# Altium PCB Nissan-RB25DET-ECU.PcbDoc (part 2 of 2)
Units mm, origin at the board's own origin, x right, y up, seen from the top; angles counter-clockwise.
Board outline 159 x 152 mm, 2 copper layers (Top Layer, Bottom Layer); 165 components, 7 nets, 721 pads, 78 vias.
Unrouted connection lines stored in the file: 23.
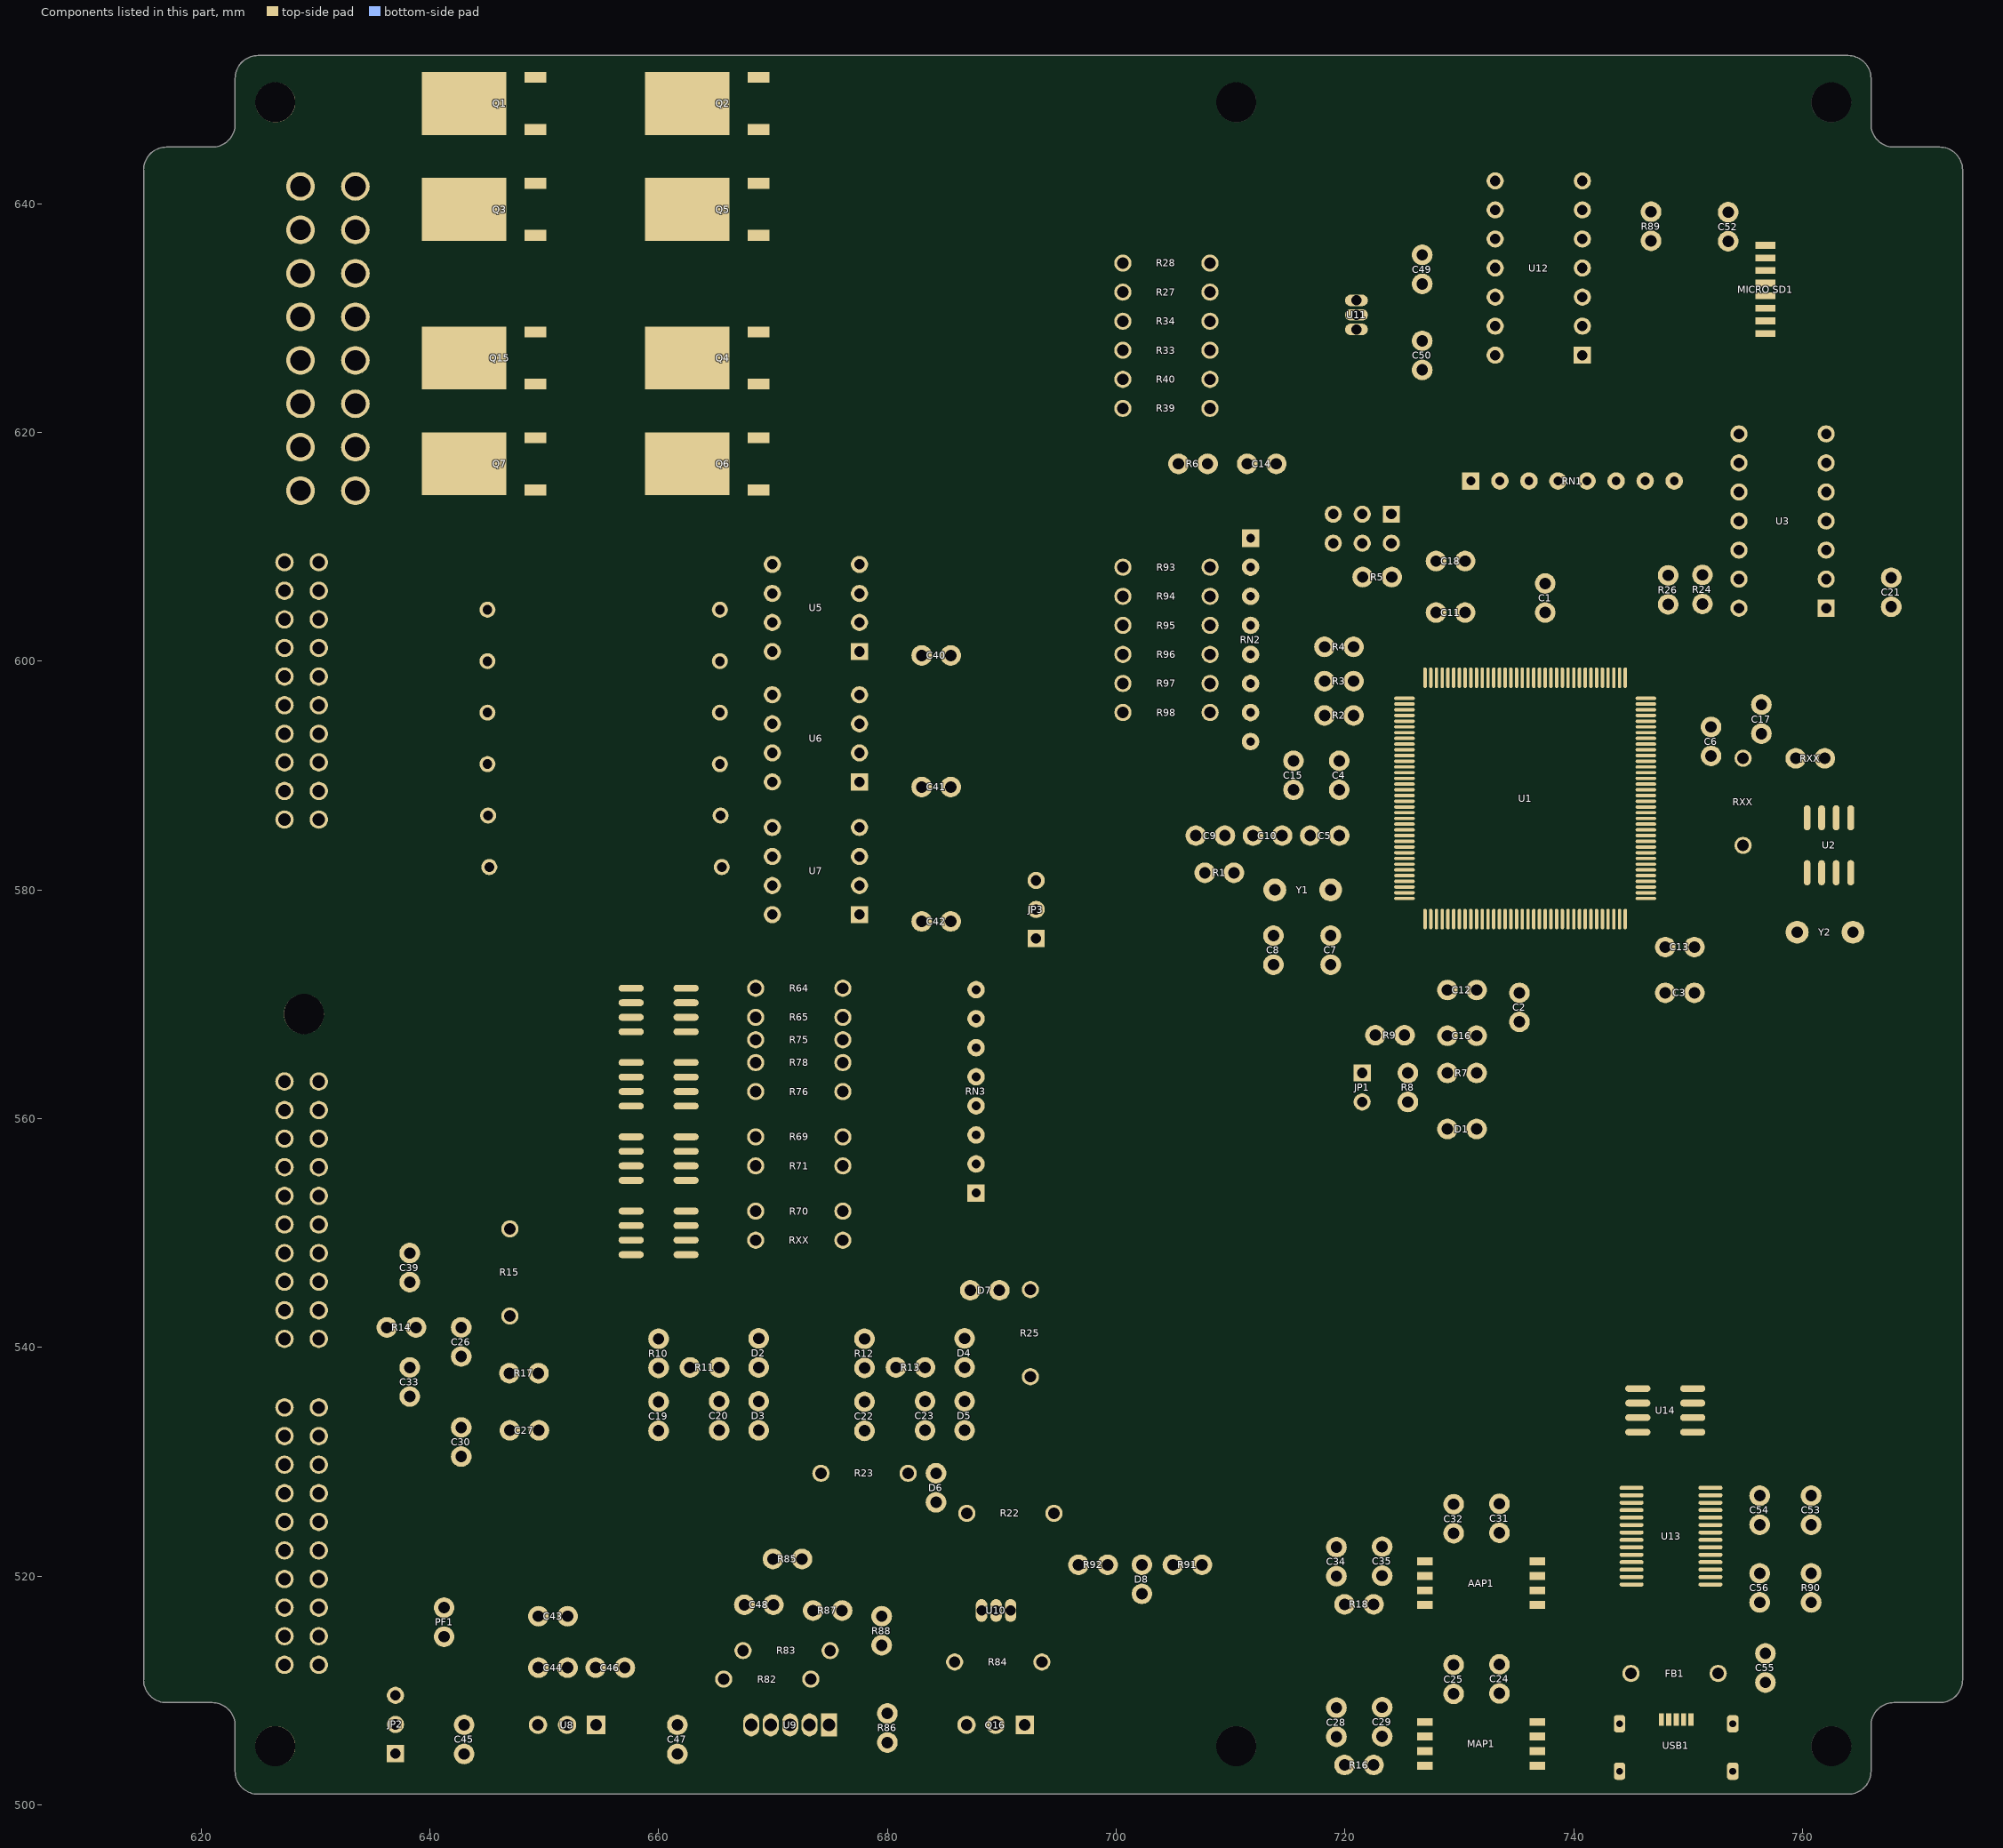
[diagram p2: the components of this part, seen from the top]

## Via types
v1: diameter 0.55, hole 0.254, Top Layer to Bottom Layer, 35 vias
v2: diameter 2, hole 1, Top Layer to Bottom Layer, 25 vias
v3: diameter 1, hole 0.6, Top Layer to Bottom Layer, 8 vias
v4: diameter 1.6, hole 0.8, Top Layer to Bottom Layer, 7 vias
v5: diameter 1.2, hole 0.5, Top Layer to Bottom Layer, 2 vias
v6: diameter 1.6/1.6 (per signal layer), hole 0.8, Top Layer to Bottom Layer, 1 vias

## Nets (pads, with @x,y where several pads share a name; then routed paths per layer and width w, separated by ;. In a path a pad name is that pad's centre, name@x,y a point inside that pad or via, vN(x,y) a via of type N, cw(c..) or ccw(c..) an arc to the next point about the centre after c; other vN are vias at no path point) (continued)
copper on no net: | length 7148.1
  Top Layer w0.254: 627.3,522.25 626,522.25 625,523.25 625,535.75 626.5,537.25 633.75,537.25 638,533 642.75,533 645.75,530 650.25,530 651.75,531.5 v1(651.75,540) ; 627.3,532.25 630.3,532.25 635.5,532.25 640.634,527.116 653.116,527.116 655.75,529.75 670.5,529.75 673.25,532.5 673.25,536.5 674.96,538.21 678,538.21 678,535.25 ; 627.3,534.75 630.3,534.75 634.25,534.75 641,528 652.75,528 655,530.25 655,536.5 656.71,538.21 660,538.21 660,535.25 ; 630.25,548.25 630.3,548.25 638.25,548.25 ; 630.3,522.25 630.25,522.25 632,524 663.061,524 665.311,526.25 675.439,526.25 679.189,522.5 695.21,522.5 696.71,521 ; 630.3,524.75 662.75,524.75 665,527 675.75,527 679.5,523.25 686.75,523.25 691.5,528 691.5,536.44 692.5,537.44 ; 630.3,529.75 636.75,529.75 640.25,526.25 662.129,526.25 664.879,529 674.19,529 ; 630.3,543.25 631,543.25 636,538.25 638.25,538.25 639.5,537 643.25,537 647,540.75 v1(653,540.75) ; 630.3,545.75 633.25,545.75 635,544 640.5,544 642.75,541.75 638.79,541.75 ; 649.25,614.97 650.97,614.97 652.25,616.25 657.75,621.75 673,621.75 688.75,606 688.75,573.543 714.393,547.9 748.707,547.9 767.7,566.893 767.7,589.207 758.657,598.25 752.25,598.25 749.75,595.75 746.3,595.75 ; 649.25,624.22 650.72,624.22 652,625.5 659.25,632.75 671.25,632.75 689.25,614.75 689.25,573.75 714.6,548.4 748.5,548.4 767.2,567.1 767.2,589 758.45,597.75 752.457,597.75 749.957,595.25 746.3,595.25 ; 649.25,637.22 v2(652,637.22) ; 649.25,646.47 v2(652,646.47) ; 651.5,518.5 653.5,518.5 661,511 665.69,511 ; 660,538.25 662.75,538.25 ; 662.4,549.38 668.49,549.38 ; 662.4,551.92 668.49,551.92 ; 662.4,555.875 668.49,555.875 ; 662.4,558.415 668.49,558.415 ; 662.4,562.37 668.49,562.37 ; 662.4,564.91 668.49,564.91 ; 662.4,568.865 668.49,568.865 ; 662.4,571.405 668.49,571.405 ; 665.29,535.29 665.29,538.25 668.75,538.25 ; 667.5,517.5 667.5,519 670,521.5 ; 668.46,540.5 668.75,540.79 ; 668.75,535.29 668.75,538.25 ; 668.75,614.97 v2(671.5,614.97) ; 668.75,624.22 v2(671.5,624.22) ; 668.75,637.22 v2(671.5,637.22) ; 668.75,646.47 v2(671.5,646.47) ; 672.54,521.5 673.5,520.54 673.5,517 ; 673.2,507 673.2,511 ; 674.9,513.5 674.9,507 679,507 680,508 ; 676.04,517 678.5,517 679.5,516 ; 676.11,551.915 680.665,551.915 684.79,556.04 687.75,556.04 702.01,556.04 713.15,544.9 749.95,544.9 770.7,565.65 770.7,590.45 759.9,601.25 752.414,601.25 750.414,603.25 744.379,603.25 743,601.871 743,598.55 ; 676.11,555.87 682.37,555.87 685.08,558.58 687.75,558.58 700.177,558.58 713.357,545.4 749.743,545.4 770.2,565.857 770.2,590.243 759.693,600.75 752.207,600.75 750.207,602.75 744.586,602.75 743.5,601.664 743.5,598.55 ; 676.11,558.41 681.91,558.41 684.62,561.12 687.75,561.12 698.344,561.12 713.564,545.9 749.536,545.9 769.7,566.064 769.7,590.036 759.486,600.25 752,600.25 750,602.25 744.793,602.25 744,601.457 744,598.55 ; 676.11,562.365 682.865,562.365 684.16,563.66 687.75,563.66 ; 676.11,564.905 683.155,564.905 684.45,566.2 687.75,566.2 693.972,566.2 713.772,546.4 749.328,546.4 769.2,566.272 769.2,589.828 759.278,599.75 751.793,599.75 749.793,601.75 745,601.75 744.5,601.25 744.5,598.55 ; 676.11,568.86 687.75,568.86 ; 676.11,571.4 687.75,571.4 ; 677.56,580.38 v2(681.25,580.38) ; 677.56,585.46 v2(681.25,585.46) ; 677.56,591.98 v2(681.25,591.98) ; 677.56,597.06 v2(681.25,597.06) ; 677.56,603.38 v2(681.25,603.38) ; 677.56,608.46 v2(681.25,608.46) ; 678,538.25 680.75,538.25 ; 681.81,529 684.25,529 685.75,529 686.94,527.81 686.94,525.5 ; 683.29,535.29 683.29,538.25 686.75,538.25 ; 686.46,540.5 686.75,540.79 ; 686.75,535.29 686.75,538.25 ; 687.75,568.74 692.139,568.74 713.979,546.9 749.121,546.9 768.7,566.479 768.7,589.621 759.071,599.25 751.836,599.25 749.336,596.75 746.3,596.75 ; 687.75,571.28 690.306,571.28 714.186,547.4 748.914,547.4 768.2,566.686 768.2,589.414 758.864,598.75 752.043,598.75 749.543,596.25 746.3,596.25 ; 689.85,545.06 692.5,545.06 694.31,543.25 750.5,543.25 771.669,564.419 771.669,590.831 758.5,604 755.33,607.17 754.44,607.17 ; 690.77,517 690.77,515.23 693.5,512.5 692,511 692,507 ; 694.56,525.5 695.5,526.44 v1(695.5,541) ; v2@694.75,622.1 700.58,622.1 ; v2@694.75,624.64 700.58,624.64 ; v2@694.75,627.18 700.58,627.18 ; v2@694.75,629.72 700.58,629.72 ; v2@694.75,632.26 700.58,632.26 ; v2@694.75,634.8 700.58,634.8 ; v2@694.76,595.51 700.59,595.51 ; v2@694.76,598.05 700.59,598.05 ; v2@694.76,600.59 700.59,600.59 ; v2@694.76,603.13 700.59,603.13 ; v2@694.76,605.67 700.59,605.67 ; v2@694.76,608.21 700.59,608.21 ; v1(695.5,544.5) 695.5,547.957 v1(698.793,551.25) ; v1(696,540) 696,526.5 699,523.5 706.75,523.5 707.5,522.75 707.5,521 ; v1(696,545.25) 696,547.75 v1(698.5,550.25) ; 699.25,521 702.25,521 704.96,521 ; 706.96,584.75 706.96,582.29 707.75,581.5 ; 707.99,617.25 711.45,617.25 ; 708.2,622.1 718.7,622.1 720.7,620.1 731.6,620.1 733.54,618.16 733.54,615.75 733.54,602.71 735,601.25 735,598.55 ; 708.2,624.64 717.06,624.64 721,620.7 733.5,620.7 736.08,618.12 736.08,615.75 736.08,610.33 734,608.25 734,603 735.5,601.5 735.5,598.55 ; 708.2,627.18 715.42,627.18 721.3,621.3 735.4,621.3 738.62,618.08 738.62,615.75 738.62,612.12 734.5,608 734.5,603.25 736,601.75 736,598.55 ; 708.2,629.72 713.78,629.72 721.6,621.9 737.3,621.9 741.16,618.04 741.16,615.75 741.16,613.91 735,607.75 735,603.5 736.5,602 736.5,598.55 ; 708.2,632.26 712.14,632.26 721.9,622.5 739.3,622.5 743.7,618.1 743.7,615.75 743.7,607.7 738,602 738,598.55 ; 708.2,634.8 710.6,634.8 722.3,623.1 741.2,623.1 746.24,618.06 746.24,615.75 746.24,609.49 738.5,601.75 738.5,598.55 ; 708.21,595.51 711.75,595.51 714.01,595.51 716.25,597.75 716.25,602 717.439,603.189 723.061,603.189 723.75,602.5 723.75,597.25 724.25,596.75 725.2,596.75 ; 708.21,598.05 711.75,598.05 714.55,598.05 715.75,599.25 715.75,602.25 717.22,603.72 723.28,603.72 727,600 727,598.55 ; 708.21,600.59 711.75,600.59 714.34,600.59 715.25,601.5 715.25,602.5 717,604.25 723.5,604.25 727.5,600.25 727.5,598.55 ; 708.21,603.13 711.75,603.13 715.13,603.13 716.75,604.75 723.707,604.75 728,600.457 728,598.55 ; 708.21,605.67 711.75,605.67 716.33,605.67 716.75,605.25 723.914,605.25 728.5,600.664 728.5,598.55 ; 708.21,608.21 711.75,608.21 714.54,608.21 717,605.75 724.121,605.75 729,600.871 729,598.55 ; 709.25,617.25 711,615.5 ; 709.5,585 711,586.5 716.25,586.5 ; 710.27,581.52 711.96,583.21 711.96,584.75 ; 711.855,584.645 713.5,583 720.25,583 720.9,583.65 720.9,586.15 722,587.25 725.2,587.25 ; 713.81,580.06 715.75,582 720,582 721.4,583.4 721.4,584.15 723.5,586.25 725.2,586.25 ; 713.87,576.12 713.87,580 ; 714.5,584.75 716.25,586.5 ; v1(715.396,567.854) 717.293,569.75 721.043,569.75 727,575.707 727,577.45 ; v1(716.503,568.247) 717.506,569.25 721.25,569.25 727.5,575.5 727.5,577.45 ; v1(718.5,553.75) 718.5,565.043 728.707,575.25 729.5,576.043 729.5,577.45 ; 718.75,576 718.75,580 721.9,583.15 721.9,583.9 723.75,585.75 725.2,585.75 ; 719.25,505.96 719.25,504.21 719.96,503.5 ; 719.25,508.5 723.29,508.5 ; 719.25,520 719.25,518.25 719.96,517.54 ; 719.25,522.54 723.29,522.54 ; 719.5,584.75 719.5,585.75 721.5,587.75 725.2,587.75 ; 720.25,586.5 716.25,586.5 ; 720.75,598.25 723.25,595.75 723.25,591.25 723.75,590.75 725.2,590.75 ; 720.75,601.25 723.25,598.75 723.25,596.75 723.75,596.25 723.75,591.5 724,591.25 725.2,591.25 ; 720.875,595.375 722.75,593.5 722.75,591 723.5,590.25 725.2,590.25 ; 721,631.54 723.77,631.54 725,632.77 725,633.77 726.75,635.52 729,633.27 729,628 730.25,626.75 733.13,626.75 ; 721.5,564 728.96,564 ; 721.51,610.31 720.27,611.55 717.45,611.55 713.5,615.5 711,615.5 ; 721.55,607.35 722.75,608.55 722.75,611.55 724.05,612.85 728.45,612.85 729.95,611.35 730.85,611.35 732.5,609.7 732.5,601.1 732.5,598.55 ; 722.5,503.44 727,503.44 ; 722.5,503.5 723.25,504.25 723.25,506 ; 722.5,517.48 727,517.48 ; 722.5,517.54 723.25,518.29 723.25,520.04 ; 722.66,567.3 722.66,568.41 729,574.75 730,575.75 730,577.45 ; 723.25,508.54 724.75,507.04 724.75,505.5 725.54,504.71 727,504.71 ; 723.25,522.58 724.75,521.08 724.75,519.54 725.54,518.75 727,518.75 ; v1(723.75,573.75) 723.5,574 723.5,579.25 724,579.75 725.2,579.75 ; v1(724.5,575.5) 724,576 724,579 724.25,579.25 725.2,579.25 ; 725.2,567.3 728.73,563.77 ; 725.2,583.25 724.25,583.25 723.9,582.9 723.9,580.4 723,579.5 723,572.414 720.836,570.25 710.429,570.25 703.6,577.079 703.6,613.079 701.6,615.079 701.6,619.221 703.6,621.221 703.6,636.121 712.729,645.25 756.25,645.25 762,639.5 762,632.75 759,629.75 756.75,629.75 ; 725.2,583.75 724,583.75 723.4,583.15 723.4,580.65 722.5,579.75 722.5,572.621 720.629,570.75 710.636,570.75 704.1,577.286 704.1,613.286 702.1,615.286 702.1,619.014 704.1,621.014 704.1,635.914 712.936,644.75 734,644.75 737.25,641.5 737.25,638.5 738.84,636.91 740.75,636.91 ; 725.2,584.25 723.75,584.25 722.9,583.4 722.9,580.9 722,580 722,572.828 720.422,571.25 710.843,571.25 704.6,577.493 704.6,613.493 702.6,615.493 702.6,618.807 704.6,620.807 704.6,635.707 713.143,644.25 729.75,644.25 730.5,643.5 730.5,635.5 731.63,634.37 733.13,634.37 ; 725.2,584.75 723.5,584.75 722.4,583.65 722.4,581.15 721.5,580.25 721.5,573.036 720.214,571.75 711.05,571.75 705.1,577.7 705.1,613.7 703.1,615.7 703.1,618.6 705.1,620.6 705.1,635.5 705.85,636.25 710.5,636.25 723,623.75 737.75,623.75 740.75,626.75 ; 725.2,588.25 721.25,588.25 720.25,587.25 711.75,587.25 706.8,592.2 706.8,611.3 711,615.5 ; 725.5,561.46 726.6,561.46 728.96,559.1 ; v1(726,569.75) 726,571 730.5,575.5 730.5,577.45 ; 727,505.98 726.02,505.98 725.5,506.5 725.5,508.75 726.46,509.71 733.5,509.71 ; 727,520.02 726.02,520.02 725.5,520.54 725.5,522.79 726.46,523.75 733.5,523.75 ; 733.13,631.83 734.55,633.25 754.25,633.25 755.55,631.95 756.75,631.95 ; 734,577.45 734,573.5 735.25,572.25 735.25,571 ; 735.5,577.45 735.5,574 737.5,572 v1(737.5,565.5) ; 736,577.45 736,574.207 738,572.207 v1(738,566) ; 737,577.45 737,574.621 738.5,573.121 v1(738.5,566.5) ; 737.5,598.55 737.5,604.25 ; 738,577.45 738,575.036 739.5,573.536 v1(739.5,567.5) ; 739,577.45 739,575.45 740.5,573.95 v1(740.5,554.25) ; 739,598.55 739,601.5 749,611.5 751.15,611.5 754.44,614.79 ; 739.5,598.55 739.5,601.3 749.2,611 760.81,611 762.06,612.25 ; 740,577.45 740,575.864 741.5,574.364 v1(741.5,553.5) ; 740.75,629.29 740.75,631.83 ; 740.75,634.37 754.37,634.37 755.25,635.25 756.75,635.25 ; 741,577.45 741,575.75 742,574.75 v1(742,570) ; 745,511.5 747.65,508.85 747.65,507.47 ; 745.05,521.225 v1(747.25,521.225) ; 745.05,522.525 747.525,522.525 748.75,523.75 748.75,526 747.675,527.075 745.05,527.075 ; 745.05,525.125 743.375,525.125 742.75,525.75 742.75,534.5 743.385,535.135 745.6,535.135 ; 745.05,525.775 v1(747.975,525.775) ; 745.05,526.425 v1(747.25,526.425) ; 745.05,527.725 743.775,527.725 743.25,528.25 743.25,533.25 743.865,533.865 745.6,533.865 ; 745.6,532.595 744.095,532.595 743.75,532.25 743.75,531 744.5,530.25 752,530.25 754.5,527.75 754.5,526.25 756.25,524.5 ; 746.3,584.25 v1(752.2,584.25) ; 746.3,584.75 v1(752.8,584.75) ; 746.3,588.75 762.65,588.75 762.935,588.465 762.935,586.3 ; 746.3,589.25 763.55,589.25 ; 746.75,636.75 746.75,635.12 747.5,634.37 ; 748.25,607.54 752.79,607.54 753.333,608.083 753.333,608.332 753.333,608.602 754.44,609.71 ; 748.3,507.47 748.3,518.8 749.425,519.925 751.95,519.925 ; 748.95,507.47 748.95,518.45 749.775,519.275 751.95,519.275 ; v1(749.25,550.25) 764.5,565.5 v1(764.5,569) ; v1(749.75,522.525) 751.95,522.525 754.275,522.525 756.25,524.5 ; 750.4,533.865 754.165,533.865 v1(754.8,534.5) ; 750.4,535.135 754.439,535.135 v1(755.304,536) ; 751.95,520.575 756.25,520.575 ; 751.95,521.875 759.125,521.875 760.75,520.25 ; 752.62,511.5 754.37,513.25 756.75,513.25 759.25,513.25 760.75,514.75 760.75,517.71 760.96,517.71 763,519.75 763,522.25 760.75,524.5 756.25,524.5 ; 754.44,612.25 756.5,614.31 756.5,617.81 754.44,619.87 ; 754.44,617.33 753.42,617.33 752.75,618 752.75,621 754.5,622.75 762.45,622.75 764.8,620.4 764.8,599.3 772.8,591.3 772.8,563.95 750.969,542.119 694.119,542.119 690.25,538.25 686.75,538.25 ; 754.8,583.89 754.8,587.95 755.6,588.75 ; 756.75,633.05 v1(759,633.05) ; 756.75,634.15 v1(760.65,634.15) ; 759.52,576.3 760.395,577.175 760.395,581.5 ; 761.665,581.5 761.665,579.035 764.4,576.3 ; 761.94,591.5 761.94,590.86 763.55,589.25 ; 762.04,590.76 762.04,591.5 ; 762.06,604.63 763.57,604.63 764.2,604 764.2,599.1 772.234,591.066 772.234,564.184 750.734,542.684 676.184,542.684 671.75,538.25 668.75,538.25 ; 762.06,607.17 762.06,609.71 ; 764.205,586.3 764.205,588.595 763.55,589.25
  Top Layer w0.5: 627.3,514.75 630.3,514.75 631.75,514.75 633.5,513 633.5,506 635,504.5 637,504.5 ; 627.3,517.25 628.55,516 632.5,516 635,513.5 635,511.58 637,509.58 ; 627.3,591.15 628.55,589.9 633.1,589.9 634.1,588.9 634.1,578.2 650.545,561.755 651.145,561.755 653.25,561.755 654.5,561.755 ; 627.3,596.15 628.55,594.9 633.8,594.9 636.1,592.6 636.1,585.4 653.25,568.25 654.5,568.25 ; 627.3,603.65 628.55,602.4 633.8,602.4 639.3,596.9 639.3,587.9 645.2,582 ; 627.3,606.15 628.55,604.9 635.3,604.9 642.1,598.1 642.1,593.94 645.04,591 ; 627.3,608.65 628.55,607.4 636.6,607.4 644,600 645.04,600 ; 630.3,517.25 641.25,517.25 ; 630.3,540.75 628.8,542.25 628.8,549.25 630.3,550.75 ; 630.3,588.65 632.25,588.65 633.1,587.8 633.1,577.8 653.1,557.8 653.6,557.8 654.5,557.8 ; 630.3,593.65 633.55,593.65 635.1,592.1 635.1,578.7 649.505,564.295 650.105,564.295 653.25,564.295 654.5,564.295 ; 630.3,601.15 631.65,601.15 637.1,595.7 637.1,585.9 652.21,570.79 653.25,570.79 654.5,570.79 ; 630.3,603.65 634.55,603.65 640.7,597.5 640.7,590.9 645.1,586.5 ; 630.3,606.15 635.99,606.15 643.5,598.64 643.5,597.04 645.04,595.5 ; 630.3,608.65 637.25,608.65 641.4,604.5 645.04,604.5 ; 637,507 643,507 645,507 647.5,504.5 653.5,504.5 ; 647.6,566.2 667.79,566.2 668.49,566.9 ; v2(652.7,548.765) 654.5,548.765 ; v5(653.22,555.23) 654.47,555.23 655.115,555.875 657.6,555.875 ; v5(653.25,551.305) 654.5,551.305 ; 654.5,555.26 655.155,554.605 657.6,554.605 ; 654.54,511.96 654.54,507 654.54,505.54 653.5,504.5 ; 657.6,548.11 655.155,548.11 654.5,548.765 ; 657.6,549.38 655.115,549.38 654.5,548.765 ; 657.6,550.65 655.155,550.65 654.5,551.305 ; 657.6,551.92 655.115,551.92 654.5,551.305 ; 657.6,557.145 655.155,557.145 654.5,557.8 ; 657.6,558.415 655.115,558.415 654.5,557.8 ; 657.6,561.1 655.155,561.1 654.5,561.755 ; 657.6,562.37 655.115,562.37 654.5,561.755 ; 657.6,563.64 655.155,563.64 654.5,564.295 ; 657.6,564.91 655.115,564.91 654.5,564.295 ; 657.6,567.595 655.155,567.595 654.5,568.25 ; 657.6,568.865 655.115,568.865 654.5,568.25 ; 657.6,570.135 655.155,570.135 654.5,570.79 ; 657.6,571.405 655.115,571.405 654.5,570.79 ; 660,540.79 668.75,540.79 ; 665.36,591 666.9,591 667.88,591.98 669.94,591.98 ; 665.36,595.5 666.9,595.5 668.46,597.06 669.94,597.06 ; 665.36,600 666.7,600 667.3,600.6 667.3,601.6 667.3,601.9 668.78,603.38 669.94,603.38 ; 665.36,604.5 666.5,604.5 667.45,605.45 667.45,607.25 668.66,608.46 669.94,608.46 ; 665.42,586.5 666.96,586.5 668,585.46 669.94,585.46 ; 665.52,582 667.06,582 668.68,580.38 669.94,580.38 ; 668.1,507 668.1,512.78 667.38,513.5 667.38,521.88 669,523.5 673,523.5 675,521.5 675,520 676,519 681.5,519 685.88,514.62 685.88,512.5 686.92,511.46 686.92,507 ; 669.8,507 669.8,505.3 669,504.5 666,504.5 663.5,507 660,507 657.5,504.5 653.5,504.5 ; 669.94,582.92 672.38,582.92 673.7,581.6 ; 669.94,594.52 672.38,594.52 673.7,593.2 ; 669.94,605.92 672.38,605.92 673.7,604.6 673.7,593.2 ; 673.7,589.4 675.6,587.5 681.5,587.5 683,589 ; 673.7,600.8 675.6,598.9 681.4,598.9 683,600.5 ; 678,540.79 686.75,540.79 ; 683,577.25 681.25,575.5 675.6,575.5 673.7,577.4 673.7,581.6 ; 748,533.5 748.905,532.595 750.4,532.595 ; 673.7,581.6 673.7,593.2
  Top Layer w0.8: 649.25,619.53 652,619.53 ; 649.25,628.78 652,628.78 ; 649.25,641.78 652,641.78 ; 649.25,651.03 652,651.03 ; 668.75,619.53 671.5,619.53 ; 668.75,628.78 671.5,628.78 ; 668.75,641.78 671.5,641.78 ; 668.75,651.03 671.5,651.03
  Top Layer w1: 628.7,622.5 630.3,622.5 632.176,620.624 634.376,620.624 635.5,619.5 635.5,616.25 639,612.75 653,612.75 657.5,617.25 659.75,617.25 664.25,617.25 ; 628.7,626.3 630.3,626.3 632.176,624.424 634.326,624.424 637.5,621.25 637.5,618 638.25,617.25 642.75,617.25 ; 628.7,630.1 630.3,630.1 632.2,632 653.75,632 656.25,634.5 656.25,638.25 657.5,639.5 664.25,639.5 ; 628.7,637.7 630.3,637.7 632.2,639.6 643,639.6 ; 633.5,626.3 635.2,626.3 638.5,623 639.5,622 653,622 657.5,626.5 659.75,626.5 664.25,626.5 ; 633.5,630.1 635.65,630.1 637,628.75 637,627.75 638.25,626.5 642.75,626.5 ; 633.5,633.9 652.9,633.9 654.25,635.25 654.25,645 658,648.75 659.75,648.75 664.25,648.75 ; 633.5,641.5 635.5,641.5 636.75,642.75 636.75,647.25 638.25,648.75 642.75,648.75 643,649
  Bottom Layer w0.254: 638.25,548.25 646.75,548.25 650.129,544.871 675.871,544.871 680.25,549.25 706,549.25 ; 642.75,541.75 645.341,544.341 649.659,544.341 676.091,544.341 680.5,548.75 705.5,548.75 ; 646.96,537.75 648.46,539.25 652.75,539.25 656.25,542.75 676.75,542.75 681.25,547.25 695.813,547.25 707.75,547.25 715.5,555 737.25,555 742,559.75 v1(742,570) ; v1(651.75,540) 651.75,542 653.561,543.811 676.311,543.811 680.75,548.25 706,548.25 707.25,548.25 715,556 736.75,556 738.504,557.754 738.504,566.496 v1(738.5,566.5) ; v1(653,540.75) 653,542.5 653.78,543.28 676.53,543.28 681,547.75 707.5,547.75 715.25,555.5 737,555.5 739.504,558.004 739.504,567.496 v1(739.5,567.5) ; 673.31,511 714,511 716,513 716,539 718.5,541.5 v1(718.5,553.75) ; 679.5,516.5 681,515 687.5,515 688.23,515.73 688.23,517 ; 687.75,563.66 710.41,563.66 716.5,569.75 v1(726,569.75) ; v1(695.5,541) v1(695.5,544.5) ; v1(696,545.25) 696.004,545.246 v1@696.004,540 ; v1(698.5,550.25) 698.506,550.25 v1(716.503,568.247) ; v1(698.793,551.25) v1(715.396,567.854) ; 705.25,548.75 707,548.75 714.75,556.5 736.5,556.5 738.004,558.004 738.004,565.996 v1(738,566) ; 705.75,549.25 706.75,549.25 714.5,557 736.25,557 737.5,558.25 v1(737.5,565.5) ; 719.25,505.96 716.5,508.71 716.5,538.75 732,554.25 v1(740.5,554.25) ; 719.25,520 717,522.25 717,538.5 732,553.5 v1(741.5,553.5) ; v1(723.75,573.75) 723.25,574.25 723.25,598 725.75,600.5 743.79,600.5 748.25,604.96 ; v1(724.5,575.5) 723.75,576.25 723.75,597.75 726,600 746.25,600 751.25,605 ; 733.13,626.75 735.63,624.25 742.25,624.25 744,626 744,638.25 745,639.25 746.75,639.25 757,639.25 759,637.25 v1(759,633.05) ; 733.13,629.29 731.21,629.29 730,630.5 730,635.57 731.34,636.91 733.13,636.91 ; 733.13,639.45 740.75,639.45 ; 733.13,641.99 734.89,643.75 755.5,643.75 760.65,638.6 v1(760.65,634.15) ; 733.5,523.79 740.5,530.79 740.5,541.5 v1(749.25,550.25) ; v1(747.25,521.225) v1(747.25,526.425) ; v1(747.975,525.775) 747.975,524.3 v1(749.75,522.525) ; 750.75,605.25 751,605.25 ; v1(752.2,584.25) 752.2,580.7 754.8,578.1 v1(754.8,534.5) ; v1(752.8,584.75) 752.8,580.8 755.304,578.296 v1(755.304,536) ; 754.44,604.63 757.07,602 765,602 767.75,604.75
  Bottom Layer w0.5: 627.3,560.75 628.75,562.2 628.75,563.75 630,565 631.5,565 633.5,567 641.45,567 v5(653.22,555.23) ; 630.3,553.25 628.75,554.8 628.75,558.75 629.5,559.5 631.25,559.5 632,560.25 632,564 633.75,565.75 640.75,565.75 651.5,555 651.5,553.055 v5(653.25,551.305) ; 636.25,532 640.75,527.5 650,527.5 653.75,531.25 653.75,537 657.5,540.75 660,540.75 ; 636.25,541.75 636.25,515.25 640.031,511.469 641.25,512.688 641.25,514.71 ; 637,504.5 635,504.5 633.5,506 633.5,548.5 635.5,550.5 643.25,550.5 ; 643,550.5 647,550.5 651.25,546.25 668.75,546.25 672.25,549.75 672.25,573.75 674,575.5 681.25,575.5 683,577.25 686.58,580.83 693,580.83 ; 647,533.25 647,542.75 ; 668.75,540.75 678,540.75 ; 676.11,566.9 679.65,566.9 691.04,578.29 693,578.29
  other v2: 694.76,595.46 694.76,598 694.76,600.54 694.76,603.08 694.76,605.62 694.76,608.16 694.75,622.05 694.75,624.59 694.75,627.13 694.75,629.67 694.75,632.21 694.75,634.75

## Polygon pours and split planes (outlines as drawn)
"USB GND" on Bottom Layer "Bottom Layer - USB GND" (solid, pour order 11): 741.75,537.5 741.75,501 757.57,501 757.57,509.442 763.75,509.442 763.75,530.299 748.177,530.299 748.177,537.5
"IGN GND" on Bottom Layer "Bottom Layer - INJ GND 2" (solid, pour order 10): 666.5,547 660,547 660,577.7 666.5,577.7
"INJ GND" on Bottom Layer "Bottom Layer - INJ GND" (solid, pour order 12): 626.25,611.25 673.75,611.25 673.75,652.5 631.25,652.5 631.25,645 626.25,645
"IGN GND" on Bottom Layer "Bottom Layer - INJ GND 2" (solid, pour order 15): 677.5,610 626,610 626,576 634,576 651.5,558.5 651.5,547 666.5,547 666.5,576 677.5,576
GND on Bottom Layer "Bottom Layer - GND" (solid, pour order 18): 616.983,508.945 620.983,508.945 cw(c620.983,506.945) 622.983,506.945 622.983,502.945 ccw(c624.983,502.945) 624.983,500.945 763.983,500.945 ccw(c763.983,502.945) 765.983,502.945 765.983,506.945 cw(c767.983,506.945) 767.983,508.945 771.983,508.945 ccw(c771.983,510.945) 773.983,510.945 773.983,642.945 ccw(c771.983,642.945) 771.983,644.945 767.983,644.945 cw(c767.983,646.945) 765.983,646.945 765.983,650.945 ccw(c763.983,650.945) 763.983,652.945 624.983,652.945 ccw(c624.983,650.945) 622.983,650.945 622.983,646.945 cw(c620.983,646.945) 620.983,644.945 616.983,644.945 ccw(c616.983,642.945) 614.983,642.945 614.983,510.945 ccw(c616.983,510.945)
"INJ GND" on Top Layer "Top Layer - INJ GND" (solid, pour order 13): 673.75,611.25 673.75,652.5 631.25,652.5 631.25,645 626.25,645 626.25,611.25
"USB GND" on Top Layer "Top Layer - USB GND" (solid, pour order 14): 741.75,501 757.57,501 757.57,509.442 763.75,509.442 763.75,530.299 748.177,530.299 748.177,537.5 741.75,537.5
"IGN GND" on Top Layer "Top Layer - IGN GND 2" (solid, pour order 16): 677.5,610 626,610 626,576 634,576 651.5,558.5 651.5,547 666.5,547 666.5,576 677.5,576
no net on Top Layer "Top Layer - GND" (solid, pour order 17): 616.983,508.945 620.983,508.945 cw(c620.983,506.945) 622.983,506.945 622.983,502.945 ccw(c624.983,502.945) 624.983,500.945 763.983,500.945 ccw(c763.983,502.945) 765.983,502.945 765.983,506.945 cw(c767.983,506.945) 767.983,508.945 771.983,508.945 ccw(c771.983,510.945) 773.983,510.945 773.983,642.945 ccw(c771.983,642.945) 771.983,644.945 767.983,644.945 cw(c767.983,646.945) 765.983,646.945 765.983,650.945 ccw(c763.983,650.945) 763.983,652.945 624.983,652.945 ccw(c624.983,650.945) 622.983,650.945 622.983,646.945 cw(c620.983,646.945) 620.983,644.945 616.983,644.945 ccw(c616.983,642.945) 614.983,642.945 614.983,510.945 ccw(c616.983,510.945)

## Silkscreen, mask and mechanical layers (free items; w line width, h text height)
Top Overlay:
  text "INJ1" at 653.5,645.51 h1
  text "INJ3" at 673,645.51 h1
  text "INJ5" at 653.5,636.26 h1
  text "INJ6" at 673,636.26 h1
  text "PT2" at 690.24,634.34 h1
  text "PT3" at 690.24,631.8 h1
  text "PT4" at 690.24,629.26 h1
  text "PT5" at 690.24,626.72 h1
  text "PT6" at 690.24,624.18 h1
  text "INJ2" at 673,623.26 h1
  text "PT7" at 690.24,621.64 h1
  text "PORTT" at 737.5,617.75 h1
  text "INJ4" at 673,614.01 h1
  text "BDM" at 715.75,613 h1 r270
  text "PB0" at 690.25,607.75 h1
  text "IGN1" at 682.75,607.5 h1
  text "PB1" at 690.25,605.21 h1
  text "PORTB" at 713.75,604.25 h1 r270
  text "PB2" at 690.25,602.67 h1
  text "IGN6" at 682.75,602.42 h1
  text "PB3" at 690.25,600.13 h1
  text "PB4" at 690.25,597.59 h1
  text "IGN5" at 682.75,596.1 h1
  text "PB5" at 690.25,595.05 h1
  text "IGN2" at 682.75,591.02 h1
  text "IGN3" at 682.75,584.5 h1
  text "IGN4" at 682.75,579.42 h1
  text "SPARE" at 677.39,548.92 h1
  text "RB25DET PnP ECU" at 703.5,548.5 h4
  text "SP" at 649.4,548.2 h1
  text "1" at 634,508.5 h1 r270
  text "2" at 634,506 h1 r270
Mechanical 1:
  the board outline again, w0.127

## Dimensions
762.503,648.85 to 762.503,505.15 on Mechanical 13
710.5,648.85 to 626.5,648.85 on Mechanical 13
762.503,648.85 to 710.5,648.85 on Mechanical 13
710.5,505.15 to 762.503,505.15 on Mechanical 13
626.5,505.15 to 710.5,505.15 on Mechanical 13
763.983,652.945 to 763.983,500.945 on Mechanical 13
614.983,510.945 to 773.983,510.945 on Mechanical 13

## Text inside footprints (layer, text, board x,y; h text height)
?: Top Overlay "1" at 723.5,615.75 h1 r270